# Altium PCB PCB v58 rev 1.50_2023-03-18.pcbdoc (part 2 of 2)
Units mil, origin at the board's own origin, x right, y up, seen from the top; angles counter-clockwise.
Board outline 7099.86 x 4632 mil, 2 copper layers (Top Layer, Bottom Layer); 87 components, 84 nets, 446 pads, 172 vias.
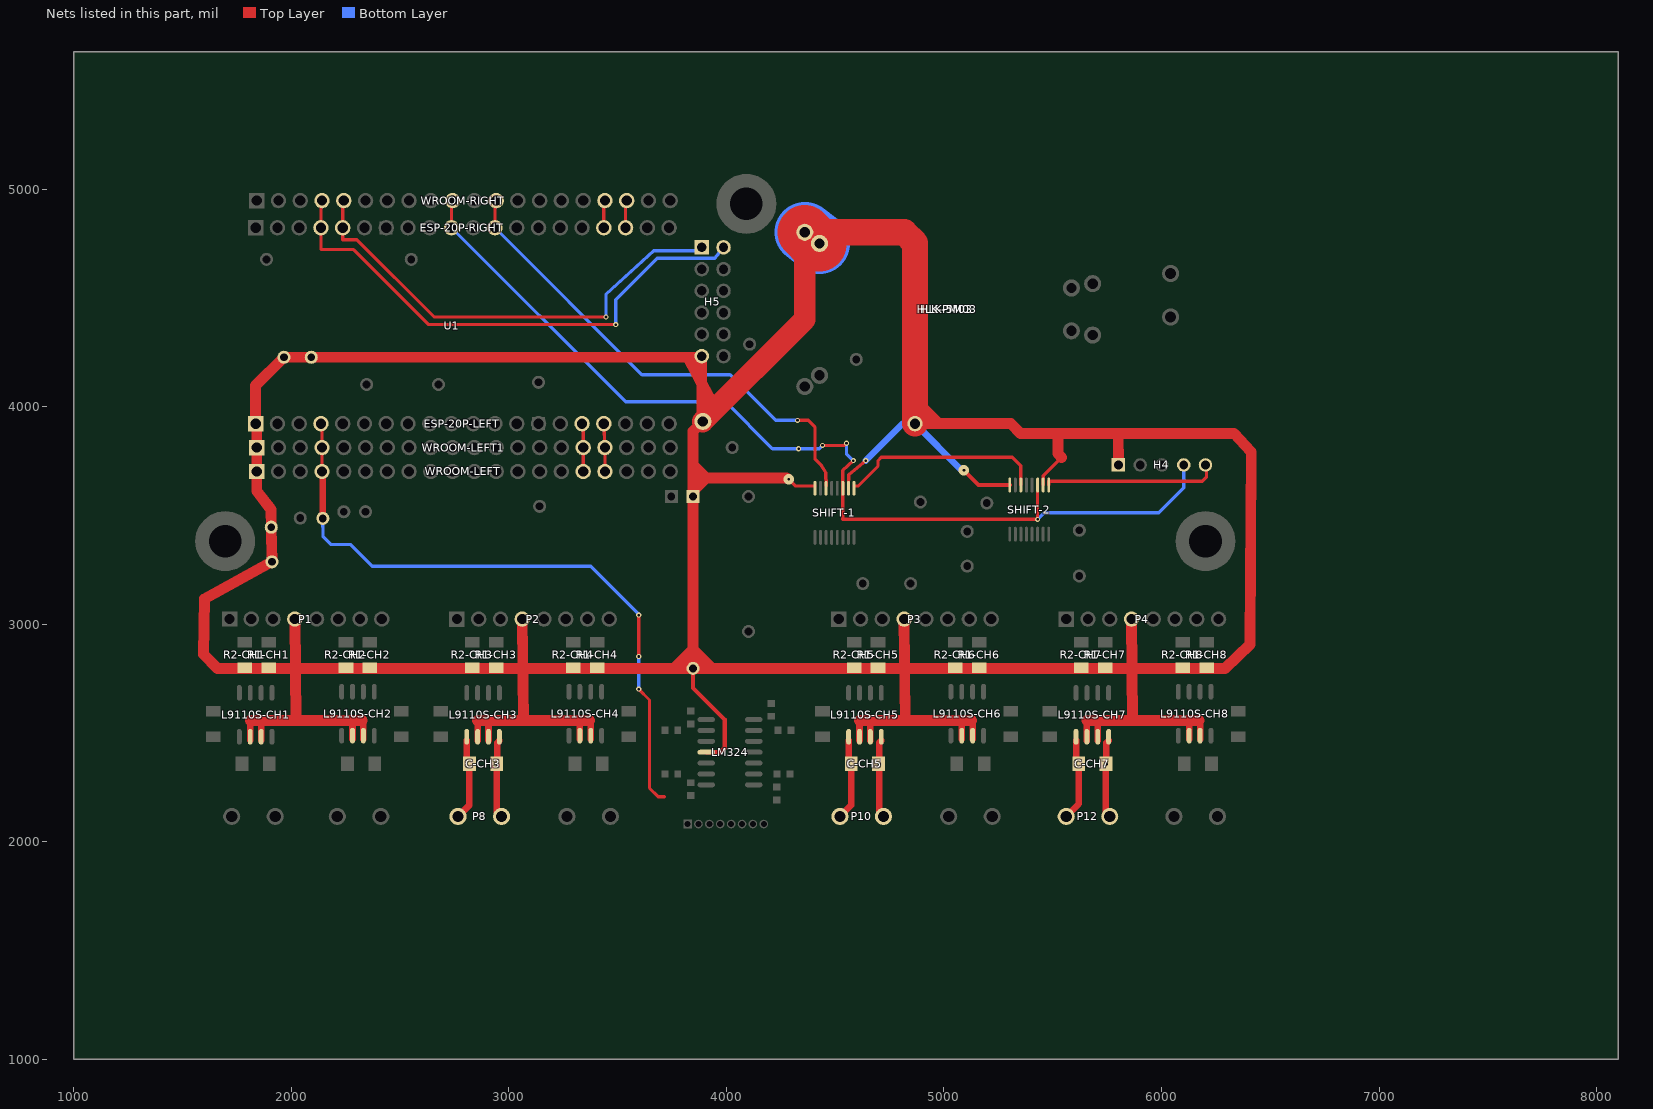
[diagram p2: the nets of this part, all layers, seen from the top]

## Via types
v1: diameter 24, hole 12, Top Layer to Bottom Layer, tented both sides, 152 vias
v2: diameter 48, hole 12, Top Layer to Bottom Layer, tented both sides, 19 vias
v3: diameter 48, hole 24, Top Layer to Bottom Layer, tented both sides, 1 vias

## Nets (pads, with @x,y where several pads share a name; then routed paths per layer and width w, separated by ;. In a path a pad name is that pad's centre, name@x,y a point inside that pad or via, vN(x,y) a via of type N, cw(c..) or ccw(c..) an arc to the next point about the centre after c; other vN are vias at no path point) (continued)
RJ11-CH3_1: C-CH3.2 L9110S-CH3.1 P8.2 | length 375.4
  Top Layer w30: P8.2@2767,2117 2819.3,2169.3 C-CH3.2@2819.3,2358.9 ; L9110S-CH3.1@2807,2465.8 2807,2370.9 C-CH3.2@2819,2358.9
RJ11-CH3_3: C-CH3.1 L9110S-CH3.4 P8.1 | length 364.1
  Top Layer w30: C-CH3.1@2944.7,2358.9 2944.7,2139.3 P8.1@2967,2117 ; v1(2947,2357) 2947,2455.8 L9110S-CH3.4@2957,2465.8
RJ11-CH5_1: C-CH5.2 L9110S-CH5.1 P10.2 | length 375.4
  Top Layer w30: P10.2@4522,2117 4574.3,2169.3 C-CH5.2@4574.3,2358.9 ; L9110S-CH5.1@4562,2465.8 4562,2370.9 C-CH5.2@4574,2358.9
RJ11-CH5_3: C-CH5.1 L9110S-CH5.4 P10.1 | length 361.2
  Top Layer w30: L9110S-CH5.4@4712,2465.8 4702,2455.8 v1(4702,2357) 4702,2137 P10.1@4722,2117
RJ11-CH7_1: C-CH7.2 L9110S-CH7.1 P12.2 | length 377.5
  Top Layer w30: P12.2@5562,2117 5619.3,2174.3 C-CH7.2@5619.3,2358.9 ; L9110S-CH7.1@5607,2465.8 5607,2370.9 C-CH7.2@5619,2358.9
RJ11-CH7_3: C-CH7.1 L9110S-CH7.4 P12.1 | length 362
  Top Layer w30: C-CH7.1@5744.7,2358.9 5744.7,2134.3 P12.1@5762,2117 ; v1(5747,2357) 5747,2455.8 L9110S-CH7.4@5757,2465.8
RX: ESP-20P-RIGHT.5 H5.1 U1.24 WROOM-RIGHT.5 | length 2167.7
  Top Layer w15: WROOM-RIGHT.5@2242,4947 2237,4942 2237,4827 2237,4767 2302,4767 2657,4412 v1(3447,4412)
  Bottom Layer w15: v1(3447,4412) 3447,4517 3667,4717 3872,4717 H5.1@3887,4732
S$711192: 
S$711201: 
SD0: ESP-20P-RIGHT.18 U1.37 WROOM-RIGHT.18 | length 127.1
  Top Layer w15: ESP-20P-RIGHT.18@3537,4822 3537,4942 WROOM-RIGHT.18@3542,4947
SD1: ESP-20P-RIGHT.17 U1.36 WROOM-RIGHT.17 | length 127.1
  Top Layer w15: ESP-20P-RIGHT.17@3437,4822 3437,4942 WROOM-RIGHT.17@3442,4947
SD2: ESP-20P-LEFT.16 U1.16 WROOM-LEFT1.16 WROOM-LEFT.16 | length 620
  Top Layer w15: ESP-20P-LEFT.16@3337,3922 3342,3917 WROOM-LEFT1.16@3342,3812 3342,3737.8 ; WROOM-LEFT1.16@3340.7,3796.9 WROOM-LEFT1.16@3342,3796.9 ; WROOM-LEFT1.16@3341.1,3802.2 WROOM-LEFT1.16@3342,3801.3 ; WROOM-LEFT1.16@3337,3827 WROOM-LEFT1.16@3342,3822 ; WROOM-LEFT1.16@3337,3827 WROOM-LEFT1.16@3342,3822 ; WROOM-LEFT1.16@3337,3827 WROOM-LEFT1.16@3342,3822 ; WROOM-LEFT1.16@3337,3827 WROOM-LEFT1.16@3342,3822 ; WROOM-LEFT.16@3342,3702 WROOM-LEFT.16@3342,3731.6 ; WROOM-LEFT.16@3342,3702 WROOM-LEFT.16@3342,3731.6 ; WROOM-LEFT.16@3342,3702 WROOM-LEFT.16@3342,3731.6 ; WROOM-LEFT.16@3342,3702 WROOM-LEFT.16@3342,3731.6 ; WROOM-LEFT.16@3342,3731.6 3342,3737.8 ; WROOM-LEFT.16@3342,3731.6 3342,3737.8 ; 3342,3737.8 WROOM-LEFT1.16@3342,3796.9 ; 3342,3737.8 WROOM-LEFT1.16@3342,3796.9 ; 3342,3737.8 WROOM-LEFT1.16@3342,3796.9 ; WROOM-LEFT1.16@3342,3796.9 WROOM-LEFT1.16@3342,3799.7 ; WROOM-LEFT1.16@3342,3796.9 WROOM-LEFT1.16@3342,3799.7 ; WROOM-LEFT1.16@3342,3799.7 WROOM-LEFT1.16@3342,3801.3 ; WROOM-LEFT1.16@3342,3799.7 WROOM-LEFT1.16@3342,3801.3 ; WROOM-LEFT1.16@3342,3799.7 WROOM-LEFT1.16@3342,3801.3 ; WROOM-LEFT1.16@3342,3799.7 WROOM-LEFT1.16@3342,3801.3 ; WROOM-LEFT1.16@3342,3801.3 WROOM-LEFT1.16@3342,3822 ; WROOM-LEFT1.16@3342,3801.3 WROOM-LEFT1.16@3342,3822 ; WROOM-LEFT1.16@3342,3801.3 WROOM-LEFT1.16@3342,3822 ; WROOM-LEFT1.16@3342,3801.3 WROOM-LEFT1.16@3342,3822
SD3: ESP-20P-LEFT.17 U1.17 WROOM-LEFT1.17 WROOM-LEFT.17 | length 618.1
  Top Layer w15: ESP-20P-LEFT.17@3437,3922 WROOM-LEFT1.17@3442,3812 3442,3737.8 ; WROOM-LEFT1.17@3440.7,3796.9 WROOM-LEFT1.17@3442,3796.9 ; WROOM-LEFT1.17@3441.1,3802.2 WROOM-LEFT1.17@3442,3801.3 ; WROOM-LEFT1.17@3437,3827 WROOM-LEFT1.17@3442,3822 ; WROOM-LEFT1.17@3437,3827 WROOM-LEFT1.17@3442,3822 ; WROOM-LEFT1.17@3437,3827 WROOM-LEFT1.17@3442,3822 ; WROOM-LEFT1.17@3437,3827 WROOM-LEFT1.17@3442,3822 ; WROOM-LEFT.17@3442,3702 WROOM-LEFT.17@3442,3731.6 ; WROOM-LEFT.17@3442,3702 WROOM-LEFT.17@3442,3731.6 ; WROOM-LEFT.17@3442,3702 WROOM-LEFT.17@3442,3731.6 ; WROOM-LEFT.17@3442,3702 WROOM-LEFT.17@3442,3731.6 ; WROOM-LEFT.17@3442,3731.6 3442,3737.8 ; WROOM-LEFT.17@3442,3731.6 3442,3737.8 ; 3442,3737.8 WROOM-LEFT1.17@3442,3796.9 ; 3442,3737.8 WROOM-LEFT1.17@3442,3796.9 ; 3442,3737.8 WROOM-LEFT1.17@3442,3796.9 ; WROOM-LEFT1.17@3442,3796.9 WROOM-LEFT1.17@3442,3799.7 ; WROOM-LEFT1.17@3442,3796.9 WROOM-LEFT1.17@3442,3799.7 ; WROOM-LEFT1.17@3442,3799.7 WROOM-LEFT1.17@3442,3801.3 ; WROOM-LEFT1.17@3442,3799.7 WROOM-LEFT1.17@3442,3801.3 ; WROOM-LEFT1.17@3442,3799.7 WROOM-LEFT1.17@3442,3801.3 ; WROOM-LEFT1.17@3442,3799.7 WROOM-LEFT1.17@3442,3801.3 ; WROOM-LEFT1.17@3442,3801.3 WROOM-LEFT1.17@3442,3822 ; WROOM-LEFT1.17@3442,3801.3 WROOM-LEFT1.17@3442,3822 ; WROOM-LEFT1.17@3442,3801.3 WROOM-LEFT1.17@3442,3822 ; WROOM-LEFT1.17@3442,3801.3 WROOM-LEFT1.17@3442,3822
SENSORVN: ESP-20P-LEFT.4 pad.26 U1.4 WROOM-LEFT1.4 WROOM-LEFT.4 | length 3025.3
  Top Layer w15: ESP-20P-LEFT.4@2137,3922 2142,3917 WROOM-LEFT1.4@2142,3812 WROOM-LEFT.4@2142,3702 ; v1(3597,2702) 3647,2652 3647,2247 3687,2207 3714.44,2207 ; v1(3597,2852) v1(3597,3042)
  Top Layer w30: WROOM-LEFT.4@2142,3702 2145.59,3698.41 pad.26@2145.59,3486.66
  Bottom Layer w15: pad.26@2145.59,3486.66 2147,3402 2182,3367 2272,3367 2372,3267 3377,3267 3597,3047 v1(3597,3042) ; v1(3597,2702) v1(3597,2852)
SER: ESP-20P-RIGHT.12 SHIFT-1.14 U1.31 WROOM-RIGHT.12 | length 2265.9
  Top Layer w15: ESP-20P-RIGHT.12@2937,4822 2937,4942 WROOM-RIGHT.12@2942,4947 ; v1(4327,3937) 4377,3937 4407,3907 4407,3759.86 4414.86,3752 ; 4414.9,3752 4434.9,3732 4457,3697 SHIFT-1.14@4458.6,3635.1
  Bottom Layer w15: ESP-20P-RIGHT.12@2937,4822 3612,4147 4017,4147 4227,3937 v1(4327,3937)
SHIFT-2_9: H4.5 SHIFT-2.9 | length 807.7
  Top Layer w15: SHIFT-2.9@5481.6,3640.1 5481.6,3657 6187,3657 6207,3677 6207,3727 H4.5@6202,3732
SHIFT-2_14: SHIFT-1.9 SHIFT-2.14 | length 940.5
  Top Layer w15: SHIFT-1.9@4586.6,3635.1 4605.1,3635.1 4697,3727 4697,3752 4712,3767 5314.9,3767 5353.6,3728.2 SHIFT-2.14@5353.6,3640.1
SRCLK: ESP-20P-RIGHT.10 H4.4 SHIFT-1.11 SHIFT-2.11 U1.29 WROOM-RIGHT.10 | length 4656.9
  Top Layer w15: ESP-20P-RIGHT.10@2737,4822 2737,4942 WROOM-RIGHT.10@2742,4947 ; v1(4442,3822) 4542,3822 v1(4552,3832) ; v1(4584.14,3752) 4535.4,3707 4535.4,3635.1 4535.4,3482 v1(5430.4,3482) SHIFT-2.11@5430.4,3644.8
  Bottom Layer w15: ESP-20P-RIGHT.10@2737,4827 ESP-20P-RIGHT.10@2737,4822 3537,4022 3997,4022 4212,3807 v1(4332,3807) 4427,3807 v1(4442,3822) ; v1(4552,3832) 4552,3784.14 v1(4584.14,3752) ; v1(5430.4,3482) 5460.4,3512 5987,3512 6102,3627 H4.4@6102,3732
TX: ESP-20P-RIGHT.4 H5.2 U1.23 WROOM-RIGHT.4 | length 2437.7
  Top Layer w15: WROOM-RIGHT.4@2142,4947 2137,4942 2137,4827 2137,4722 2287,4722 2632,4377 v1(3492,4377)
  Bottom Layer w15: v1(3492,4377) 3492,4492 3682,4682 3947,4682 H5.2@3987,4732
VCC: ESP-20P-LEFT.1 H4.1 H5.11 HLK-5M03.4 HLK-PM03.4 L9110S-CH1.2 L9110S-CH1.3 L9110S-CH2.2 L9110S-CH2.3 L9110S-CH3.2 L9110S-CH3.3 L9110S-CH4.2 L9110S-CH4.3 L9110S-CH5.2 L9110S-CH5.3 L9110S-CH6.2 L9110S-CH6.3 L9110S-CH7.2 L9110S-CH7.3 L9110S-CH8.2 L9110S-CH8.3 LM324.4 P1.4 P2.4 P3.4 P4.4 pad.1@3847,3587 pad.2 pad.19 pad.20 pad.21 pad.22 pad.23 pad.24 R1-CH1.2 R1-CH2.2 R1-CH3.2 R1-CH4.2 R1-CH5.2 R1-CH6.2 R1-CH7.2 R1-CH8.2 R2-CH1.2 R2-CH2.2 R2-CH3.2 R2-CH4.2 R2-CH5.2 R2-CH6.2 R2-CH7.2 R2-CH8.2 SHIFT-1.10 SHIFT-1.16 SHIFT-2.10 SHIFT-2.16 U1.1 WROOM-LEFT1.1 WROOM-LEFT.1 | length 27779.6
  Top Layer w15: v2(4287,3667) 4318.9,3635.1 SHIFT-1.16@4407.4,3635.1 ; 4482,4747 4482,4791.3 ; SHIFT-1.10@4561,3635.1 4562,3687 v1(4640.57,3752) ; SHIFT-2.16@5302.43,3639.83 5158.9,3640.1 ; SHIFT-2.16@5302.4,3640.1 5158.9,3640.1 ; 5532,3758.4 5540.6,3767 ; v2(5092,3707) 5158.9,3640.1 ; v2(5092,3707) 5158.9,3640.1 ; v2(5092,3707) 5158.9,3640.1 ; 5456,3682.4 5456,3640.1 5456,3682.4 ; 5456,3682.4 5540.6,3767 ; 5456,3682.4 5540.6,3767
  Top Layer w20: pad.19@3847,2797 3847,2707 3992,2562 3992,2432 3972,2412 LM324.4@3907.98,2412 ; 5158.9,3640.1 5302.4,3640.1 5158.9,3640.1 ; 5158.9,3640.1 v2(5092,3707) 5158.9,3640.1
  Top Layer w30: L9110S-CH1.2@1812,2465.9 1812,2547.1 ; L9110S-CH1.3@1862,2465.9 1862,2547 1862,2547.1 ; L9110S-CH2.2@2282,2470.9 2282,2542.4 2282,2547.1 ; L9110S-CH2.3@2332,2470.9 2332,2547.1 ; L9110S-CH3.2@2857,2465.8 2857,2547 ; L9110S-CH3.3@2907,2465.8 2907,2547 ; L9110S-CH4.2@3327,2470.8 3327,2547 ; L9110S-CH4.3@3377,2470.8 3377,2547 ; L9110S-CH5.2@4612,2465.8 4612,2547 ; L9110S-CH5.3@4662,2465.8 4662,2547 ; L9110S-CH6.2@5082,2470.8 5082,2547 ; L9110S-CH6.3@5132,2470.8 5132,2547 ; L9110S-CH7.2@5657,2465.8 5657,2547 ; L9110S-CH7.3@5707,2465.8 5707,2547 ; L9110S-CH8.2@6127,2470.8 6127,2547 ; L9110S-CH8.3@6177,2470.8 6177,2547
  Top Layer w50: R2-CH1.2@1787,2795.9 1897,2795.9 2016.6,2795.9 2017,2797 ; R2-CH1.2@1787,2796 1897,2796 2016.6,2796 2017,2797.1 ; 1812,2557.12 2022,2557.12 P1.4@2017,3024.01 ; pad.24@1908.69,3445.96 pad.23@1912,3287 1602,3117 1597,2862 1662,2797 pad.19@3847,2797 ; pad.24@1908.69,3445.96 1907,3527 1842,3612 WROOM-LEFT.1@1842,3702 WROOM-LEFT1.1@1842,3812 1842,3912 1837,3917 1837,4097 pad.21@1967,4227 pad.22@2092.42,4227 3882,4227 H5.11@3887,4232 pad.20@3887,3937 ; 2017,2557.12 2327,2557.12 ; 2022,2795.5 2022.4,2795.9 2252,2795.9 R1-CH2.2@2362,2795.9 ; 2022,2795.6 2022.4,2796 2252,2796 R1-CH2.2@2362,2796 ; R2-CH3.2@2832,2795.9 2942,2795.9 3061.6,2795.9 3062,2797 ; 2857,2557 3067,2557 P2.4@3062,3023.89 ; 3062,2557 3372,2557 ; 3067,2795.5 3067.4,2795.9 3297,2795.9 R1-CH4.2@3407,2795.9 ; 3759.23,2797 3841.55,2879.32 3847,2879.32 ; 3822,4227 3950,3988 pad.20@3887,3937 ; pad.19@3847,2812 3847,2795.9 R1-CH6.2@5162,2795.9 ; 3847,2884.7 3923.2,2808.4 3923.2,2795.9 ; 3847,3622.07 3856.47,3622.07 3906.4,3672 ; 3847,3731.3 3906.4,3672 ; pad.19@3869,2806 3856,2806 pad.19@3847,2797 ; v2@4277,3672 3906.4,3672 ; R2-CH5.2@4587,2795.9 4697,2795.9 4816.6,2795.9 4817,2797 ; 4612,2557 4822,2557 P3.4@4817,3023.89 ; 4817,2557 5127,2557 ; 4822,2795.5 4822.4,2795.9 5052,2795.9 R1-CH6.2@5162,2795.9 ; pad.2@4867,3922 5307,3922 5352,3877 6332,3877 6412,3792 6407,2907 6292,2795.9 5867.4,2795.9 ; 4867,4030.27 4963.46,3933.81 4963.46,3922 ; 5524,3877 5523.38,3784.19 5540.57,3767 ; R2-CH7.2@5632,2795.9 5742,2795.9 5861.6,2795.9 5862,2797 ; 5657,2557 5867,2557 P4.4@5862,3023.89 ; 5799.5,3877 5801,3877 H4.1@5802,3732 ; 5862,2557 6172,2557 ; 5867,2795.5 5867.4,2795.9 ; R1-CH8.2@6192,2795.9 R1-CH6.2@5162,2795.9 ; R1-CH8.2@6207,2795.9 6097,2795.9 5867.4,2795.9 ; pad.19@3847,2797 3847,3887 pad.20@3892,3931.99 pad.20@3887,3937
  Top Layer w100: pad.20@3892,3931.99 4360.59,4400.59 HLK-5M03.4@4360.59,4801.33
  Top Layer w120: HLK-5M03.4@4360.6,4801.3 4817.7,4801.3 4867,4752 pad.2@4867,3922
  Top Layer w250: HLK-5M03.4@4360.59,4801.33 4416.77,4745.15 HLK-PM03.4@4428.26,4745.15
  Bottom Layer w30: v1(4640.57,3752) 4810.6,3922 pad.2@4867,3922 5082,3707 v2(5092,3707)
  Bottom Layer w280: HLK-5M03.4@4360.56,4801.36 HLK-PM03.4@4428.26,4750.15
pads on no net: ESP-20P-LEFT.20 ESP-20P-RIGHT.20 WROOM-LEFT1.20 WROOM-LEFT.20 WROOM-RIGHT.20

## Polygon pours and split planes (outlines as drawn)
GND on Bottom Layer (solid): 1797,5082 1797,3872 1802,3867 5352,3867 5382,3897 5382,5072 5367,5087
GND on Bottom Layer (solid): 1504.5,3969.5 1504.5,1784.5 6444.5,1784.5 6449.5,1779.5 6449.5,3989.5 6434.5,4004.5
GND on Bottom Layer (solid): 1502,3952 1502,1772 1507,1767 6447,1767 6447,3962 6452,3967

## Other copper
Top Layer:
  drawing of 468 lines, arcs and shapes, not listed
  text "barbarossa" at 5662,3242 h60
Bottom Layer:
  region net CH5_6_OPAMP_IN: 4036.76,2095.02 4007.24,2095.02 4014.5,2108.8 4029.5,2108.8
  region net CH5_6_OPAMP_IN: 4126.77,2350.02 4114.04,2362.75 4109.16,2355.75 4119.77,2345.14
  region net CH1_2-BEMF: 3886.76,2068.98 3857.24,2068.98 3864.5,2055.2 3879.5,2055.2
  region net CH1_2-BEMF: 3663,2269.06 3681,2269.06 3679.5,2260.66 3664.5,2260.66
  region net CH1-BEMF: 3802.32,2063.25 3802.32,2100.75 3779.82,2089.5 3779.82,2074.5
  region net CH1-BEMF: 3918.98,2462.75 3906.25,2450.02 3913.25,2445.14 3923.86,2455.75
  region net CH7_8-BEMF: 4152.35,2080.77 4173.23,2101.65 4158.35,2106.25 4147.75,2095.65
  region net CH7_8-BEMF: 4048,2244.06 4066,2244.06 4064.5,2235.66 4049.5,2235.66
  region net RX: 3853.54,4698.54 3853.54,4735.75 3831.04,4724.5 3831.04,4709.5
  region net CH1-BEMF: 1698.25,3059.44 1735.75,3059.44 1724.5,3062 1709.5,3062
  region net CH3_4_OPAMP_IN: 2789.06,2988.46 2726.57,2988.46 2685.34,2943.46 2727.77,2943.46
  region net CH3_4_OPAMP_IN: 2743.25,3059.32 2780.75,3059.32 2769.5,3081.82 2754.5,3081.82
  region net CH7_8_OPAMP_IN: 5526.57,3025.58 5526.57,3059.32 5504.07,3077.44 5504.07,3056.23
  region net CH7_8_OPAMP_IN: 5589.06,2988.46 5526.57,2988.46 5485.34,2943.46 5527.77,2943.46
  region net CH5_6_OPAMP_IN: 4481.57,3004.69 4481.57,3042.19 4459.07,3030.64 4459.07,3015.64
  region net CH5_6_OPAMP_IN: 4544.06,2988.46 4481.57,2988.46 4440.34,2943.46 4482.77,2943.46
  region net CH7_8-BEMF: 3398.98,3412.75 3386.25,3400.02 3393.25,3395.14 3403.86,3405.75
  region net CH7_8-BEMF: 3968,2724.94 3986,2724.94 3984.5,2733.34 3969.5,2733.34
  region net CH5_6-BEMF: 3398.98,3367.75 3386.25,3355.02 3393.25,3350.14 3403.86,3360.75
  region net CH5_6-BEMF: 3908,2724.94 3926,2724.94 3924.5,2733.34 3909.5,2733.34
  region net CH7_8_OPAMP_IN: 4348,2734.94 4366,2734.94 4364.5,2743.34 4349.5,2743.34
  region net CH7_8_OPAMP_IN: 4343.98,2857.75 4331.25,2845.02 4338.25,2840.14 4348.86,2850.75
  region net CH1_2-BEMF: 2298.98,3407.75 2286.25,3395.02 2293.25,3390.14 2303.86,3400.75
  region net CH1_2-BEMF: 3723.42,2619.96 3705.42,2619.92 3706.9,2628.32 3721.9,2628.36
  region net SENSORVN: 3585.14,3043.86 3600.33,3053.53 3594.7,3059.91 3581.74,3051.65
  region net SENSORVN: 3588,2844.06 3606,2844.06 3604.5,2835.66 3589.5,2835.66
  region net SENSORVN: 3588,2709.94 3606,2709.94 3604.5,2718.34 3589.5,2718.34
  region net CH3_4_OPAMP_IN: 3899.06,2353 3899.06,2371 3890.66,2369.5 3890.66,2354.5
  region net CH1-BEMF: 3899.06,2453 3899.06,2471 3890.66,2469.5 3890.66,2454.5
  region net CH7_8_OPAMP_IN: 4049.94,3478 4049.94,3496 4058.34,3494.5 4058.34,3479.5
  region net RX: 3438,4419.94 3456,4419.94 3454.5,4428.34 3439.5,4428.34
  region net EXT-ADC2: 2807.75,4670.02 2795.02,4682.75 2790.14,4675.75 2800.75,4665.14
  region net EXT-ADC1: 2767.75,4720.02 2755.02,4732.75 2750.14,4725.75 2760.75,4715.14
  region net EXT-IO19: 3689.94,4488 3689.94,4506 3698.34,4504.5 3698.34,4489.5
  region net TX: 3483,4384.94 3501,4384.94 3499.5,4393.34 3484.5,4393.34
  region net EXT-IO22: 3694.94,4333 3694.94,4351 3703.34,4349.5 3703.34,4334.5
  region net SRCLK: 5442.37,3481.25 5429.65,3493.98 5436.65,3498.86 5447.25,3488.25
  region net RCLK: 5409.94,3758 5409.94,3776 5418.34,3774.5 5418.34,3759.5
  region net CH5_6_OPAMP_IN: 4764.06,3348 4764.06,3366 4757,3364.5 4757,3349.5
  region net CH5_6_OPAMP_IN: 4853.05,3291.68 4845.26,3275.45 4853.48,3273.17 4859.97,3286.69
  region net CH7_8_OPAMP_IN: 4794.06,3428 4794.06,3446 4785.66,3444.5 4785.66,3429.5
  region net CH7_8_OPAMP_IN: 4954.94,3343 4954.94,3361 4963.34,3359.5 4963.34,3344.5
  region net CH7_8_OPAMP_IN: 4954.94,3343 4954.94,3361 4963.34,3359.5 4963.34,3344.5
  region net SRCLK: 4543,3824.06 4561,3824.06 4559.5,3815.66 4544.5,3815.66
  region net SRCLK: 4442.75,3810.02 4430.02,3822.75 4425.14,3815.75 4435.75,3805.14
  region net SRCLK: 4339.94,3798 4339.94,3816 4348.34,3814.5 4348.34,3799.5
  region net SRCLK: 4324.06,3798 4324.06,3816 4315.66,3814.5 4315.66,3799.5
  region net RCLK: 4324.06,3868 4324.06,3886 4315.66,3884.5 4315.66,3869.5
  region net RCLK: 4339.94,3868 4339.94,3886 4348.34,3884.5 4348.34,3869.5
  region net SER: 4319.06,3928 4319.06,3946 4310.66,3944.5 4310.66,3929.5
  region net CH6-IA: 5103,3119.06 5121,3119.06 5119.5,3110.66 5104.5,3110.66
  region net CH5_6_OPAMP_IN: 4014.94,3438 4014.94,3456 4023.34,3454.5 4023.34,3439.5
  region net CH3-IA: 4358.99,3146.52 4345.98,3158.96 4352.87,3163.99 4363.71,3153.63
  region net CH4-IB: 4389.94,3108 4389.94,3126 4398.34,3124.5 4398.34,3109.5
  region net CH3-IB: 4179.06,3168 4179.06,3186 4170.66,3184.5 4170.66,3169.5
  region net CH3-IA: 4179.06,3138 4179.06,3156 4170.66,3154.5 4170.66,3139.5
  region net CH4-IB: 4182.2,3106 4176.69,3123.14 4169.04,3119.5 4173.86,3104.5
  region net CH4-IB: 4474.06,3108 4474.06,3126 4465.66,3124.5 4465.66,3109.5
  region net CH4-IA: 4182.2,3071 4176.69,3088.14 4169.04,3084.5 4173.86,3069.5
  region net CH4-IA: 3779.94,3068 3779.94,3086 3788.34,3084.5 3788.34,3069.5
  region net CH4-IB: 3779.94,3103 3779.94,3121 3788.34,3119.5 3788.34,3104.5
  region net CH3-IA: 3779.94,3138 3779.94,3156 3788.34,3154.5 3788.34,3139.5
  region net CH3-IB: 3779.94,3168 3779.94,3186 3788.34,3184.5 3788.34,3169.5
  region net CH2-IB: 4283.99,3421.64 4270.14,3410.14 4276.64,3404.62 4288.23,3414.24
  region net CH2-IB: 4167.2,3316 4161.69,3333.14 4154.04,3329.5 4158.86,3314.5
  region net CH2-IB: 3774.94,3313 3774.94,3331 3783.34,3329.5 3783.34,3314.5
  region net CH2-IB: 2248,3314.06 2266,3314.06 2264.5,3305.66 2249.5,3305.66
  region net CH2-IB: 2248,3219.94 2266,3219.94 2264.5,3228.34 2249.5,3228.34
  region net CH1-IA: 4174.06,3278 4174.06,3296 4165.66,3294.5 4165.66,3279.5
  region net CH1-IA: 3774.94,3278 3774.94,3296 3783.34,3294.5 3783.34,3279.5
  region net CH1-IA: 2203,3284.06 2221,3284.06 2219.5,3275.66 2204.5,3275.66
  region net CH1-IA: 2200.86,3217.31 2218,3211.8 2219.5,3220.14 2204.5,3224.96
  region net CH2-IB: 4415.61,3288.98 4402.88,3276.25 4398.01,3283.25 4408.61,3293.86
  region net CH3-IA: 4472.31,3265.04 4459.3,3277.48 4454.58,3270.37 4465.42,3260.01
  region net RCLK: 4528.46,3763.98 4515.73,3751.25 4510.85,3758.25 4521.46,3768.86
  region net SRCLK: 4584.89,3763.98 4572.16,3751.25 4567.28,3758.25 4577.89,3768.86
  region net CH7-IA: 5388.27,3252.76 5375.55,3240.02 5382.55,3235.15 5393.15,3245.76
  region net CH8-IB: 5554.94,3308 5554.94,3326 5563.34,3324.5 5563.34,3309.5
  region net VCC: 5088.28,3730.71 5068.94,3700.35 5056.19,3711.6 5072.7,3737.51
  region net CH5-IA: 5207.68,3685.02 5195.03,3697.82 5190.11,3690.85 5200.65,3680.18
  region net CH1-IB: 3779.94,3238 3779.94,3256 3788.34,3254.5 3788.34,3239.5
  region net CH1-IB: 4179.06,3238 4179.06,3256 4170.66,3254.5 4170.66,3239.5
  region net CH2-IA: 3779.94,3203 3779.94,3221 3788.34,3219.5 3788.34,3204.5
  region net CH2-IA: 4179.06,3203 4179.06,3221 4170.66,3219.5 4170.66,3204.5
  region net VCC: 4843.56,3895.43 4843.56,3948.57 4818.76,3937 4818.76,3907
  region net VCC: 4864.78,3886.64 4902.36,3924.22 4911.72,3898.5 4890.5,3877.28
  region net EXT-ADC2: 2566,3838.06 2513.14,3832.56 2529.5,3859.2 2544.5,3860.76
  region net EXT-ADC1: 2466,3838.06 2413.14,3832.56 2429.5,3859.2 2444.5,3860.76
  region net EXT-ADC2: 2559.5,3902.16 2514.5,3902.16 2529.5,3881.16 2544.5,3881.16
  region net EXT-ADC2: 2559.5,3941.84 2514.5,3941.84 2529.5,3962.84 2544.5,3962.84
  region net EXT-ADC2: 2559.5,3941.84 2514.5,3941.84 2529.5,3962.84 2544.5,3962.84
  region net EXT-ADC1: 2459.5,3941.84 2414.5,3941.84 2429.5,3962.84 2444.5,3962.84
  region net EXT-ADC1: 2459.5,3902.16 2414.5,3902.16 2429.5,3881.16 2444.5,3881.16
  region net EXT-ADC1: 2459.5,3941.84 2414.5,3941.84 2429.5,3962.84 2444.5,3962.84
  region net SER: 2935.12,4792.06 2966.94,4823.88 2971.18,4798.42 2960.58,4787.82
  region net RCLK: 2835.12,4792.06 2866.94,4823.88 2871.18,4798.42 2860.58,4787.82
  region net SRCLK: 2735.12,4792.06 2766.94,4823.88 2771.18,4798.42 2760.58,4787.82
  region net EXT-IO22: 3953.6,4434.1 3989.1,4398.6 3960.09,4394.48 3949.48,4405.09
  region net EXT-IO19: 3953.6,4534.1 3989.1,4498.6 3960.09,4494.48 3949.48,4505.09
  region net TX: 3992.77,4699.04 3953.57,4730.39 3952.68,4701.11 3964.4,4691.74
  region net RCLK: 5971.06,3733.94 6003.94,3701.06 5977.46,3696.85 5966.85,3707.46
  region net SRCLK: 6125.25,3711.5 6078.75,3711.5 6094.5,3689.8 6109.5,3689.8
  region net CH1-BEMF: 2381.64,3021.79 2419.22,3059.37 2388.19,3063.42 2377.59,3052.82
  region net CH3_4_OPAMP_IN: 3459.78,2988.53 3497.36,3026.11 3506.72,3000.39 3485.5,2979.17
  region net CH3_4_OPAMP_IN: 3426.64,3021.67 3464.22,3059.25 3433.19,3063.3 3422.59,3052.7
  region net CH3_4_OPAMP_IN: 3485.44,2997.32 3485.43,3050.47 3510.24,3031.4 3510.24,3016.4
  region net CH7_8_OPAMP_IN: 6256.4,3058.88 6227.99,3013.96 6217.12,3043.19 6225.35,3056.18
  region net CH7_8_OPAMP_IN: 6259.78,2988.53 6297.36,3026.11 6306.72,3000.39 6285.5,2979.17
  region net CH8-IB: 6056.4,3058.88 6027.99,3013.96 6017.12,3043.19 6025.35,3056.18
  region net CH7-IA: 5779.97,3054.43 5729.46,3037.9 5739.5,3067.28 5754.5,3072.19
  region net CH5_6_OPAMP_IN: 5243.57,3047.33 5190.43,3047.33 5209.5,3072.13 5224.5,3072.13
  region net CH5_6_OPAMP_IN: 5214.78,2988.53 5252.36,3026.11 5261.72,3000.39 5240.5,2979.17
  region net CH6-IA: 5141,3049.95 5088.14,3044.45 5104.5,3071.09 5119.5,3072.65
  region net CH5-IA: 4691.64,3048.64 4744.72,3045.96 4726.92,3071.69 4711.94,3072.45
  region net SER: 2934.78,4786.64 2972.36,4824.22 2976.41,4793.19 2965.81,4782.59
  region net RCLK: 2834.78,4786.64 2872.36,4824.22 2876.41,4793.19 2865.81,4782.59
  region net SRCLK: 2734.78,4786.64 2772.36,4824.22 2776.41,4793.19 2765.81,4782.59
  region net EXT-ADC2: 2563.57,3898.56 2510.43,3898.56 2529.5,3873.76 2544.5,3873.76
  region net EXT-ADC2: 2563.57,3945.44 2510.43,3945.44 2529.5,3970.24 2544.5,3970.24
  region net EXT-ADC2: 2563.57,3945.44 2510.43,3945.44 2529.5,3970.24 2544.5,3970.24
  region net EXT-ADC1: 2463.57,3945.44 2410.43,3945.44 2429.5,3970.24 2444.5,3970.24
  region net EXT-ADC1: 2463.57,3898.56 2410.43,3898.56 2429.5,3873.76 2444.5,3873.76
  region net EXT-ADC1: 2463.57,3945.44 2410.43,3945.44 2429.5,3970.24 2444.5,3970.24
  region net CH7_8_OPAMP_IN: 4173,2164.94 4191,2164.94 4189.5,2173.34 4174.5,2173.34
  region net CH5_6_OPAMP_IN: 4133.96,2353 4133.96,2371 4142.36,2369.5 4142.36,2354.5
  region net CH5_6_OPAMP_IN: 4283.98,2856.23 4269.74,2845.21 4274.5,2838.28 4289.5,2849.89
  region net CH7_8_OPAMP_IN: 4263,2404.94 4281,2404.94 4279.5,2413.34 4264.5,2413.34
  region net CH7_8_OPAMP_IN: 4136.31,2468.14 4130.8,2451 4139.14,2449.5 4143.96,2464.5

## Silkscreen, mask and mechanical layers (free items; w line width, h text height)
Top Overlay:
  lines w10: 3697,3537 3897,3537 3897,3637 3697,3637 3697,3537
  lines w30 net S$711192: 6422,5052 6427,5057 ; 6427,5057 5477,5057 5477,4022 6427,4022 6427,5057
  text "4" at 3048.89,5031.18 h32 r235
  text "2" at 3236,5027 h32 r270
  text "X" at 3742,5027 h20 r180
  text "0" at 3146,5022 h32 r270
  text "23" at 1973,5012 h32 r90
  text "22" at 2068,5012 h32 r90
  text "TX" at 2168,5012 h32 r90
  text "RX" at 2268,5012 h32 r90
  text "21" at 2368,5012 h32 r90
  text "19" at 2563,5012 h32 r90
  text "18" at 2663,5012 h32 r90
  text "15" at 3363,5012 h32 r90
  text "development board, no warranty" at 4472,5012 h30
  text "GND" at 2397,5006 h32
  text "sd1" at 3416.14,4996.55 h32 r15
  text "sd0" at 3506.14,4996.55 h32 r15
  text "SER" at 2924.78,4996.24 h32 r10
  text "CLK" at 3582,4994.5 h45
  text "SRCLK" at 2676.14,4991.55 h32 r15
  text "RCLK" at 2806.14,4991.55 h32 r15
  text "GND" at 1807,4989.5 h45
  text "PCB v58 rev 1.50 - screw terminal corrected" at 4417,4947 h30
  text "DANGER" at 5917,4882 h80
  text "Isolate that part" at 5857,4834.5 h45
  text "RX" at 3757,4696 h32
  text "TX" at 4047,4696 h32
  text "VCC 3.3V" at 4282,4619.5 h45
  text "230-L" at 5507,4619.5 h45
  text "L" at 6299.5,4597 h45 r270
  text "ADC1" at 3808,4577 h32 r90
  text "or 5V" at 4387,4564.5 h45
  text "ADC2" at 4103,4562 h32 r90
  text "18" at 3752,4496 h32
  text "19" at 4052,4486 h32
  text "free Pin" at 4179.5,4422 h45 r90
  text "21" at 3752,4396 h32
  text "22" at 4047,4396 h32
  text "HLK-5M0X / or HLK-PM0X" at 4477,4392 h80
  text "add. sensors" at 4244.5,4362 h45 r90
  text "N" at 6299.5,4362 h45 r270
  text "X" at 3992,4338 h32 r180
  text "ESP devkit" at 2392,4302 h80
  text "GND" at 4067,4301 h32
  text "100-240VAC" at 6399.5,4292 h45 r90
  text "23" at 3752,4291 h32
  text "(1000 or 900 mil width)" at 2347,4252 h40
  text "VCC" at 3813,4182 h32 r90
  text "/\ antenna /\" at 1892,4152 h40 r90
  text "Isolate that part" at 5847,4149.5 h45
  text "3.3V" at 1982,4147 h30
  text "GND" at 4272,4119.5 h45
  text "cutout" at 1962,4112 h30
  text "230-N" at 5502,4104.5 h45
  text "DANGER" at 5937,4022 h80
  text "VCC" at 3937,3894.5 h45
  text "GND" at 5862,3826 h32
  text "VCC" at 5762,3786 h32
  text "RCLK" at 5956.14,3781.55 h32 r15
  text "SRCLK" at 6076.14,3776.55 h32 r15
  text "QH'" at 6212.21,3771.87 h32 r19
  text "GND" at 4057,3724.5 h45
  text "en" at 1973,3587 h32 r90
  text "32" at 2468,3587 h32 r90
  text "33" at 2568,3587 h32 r90
  text "25" at 2668,3587 h32 r90
  text "26" at 2768,3587 h32 r90
  text "27" at 2868,3587 h32 r90
  text "14" at 2968,3587 h32 r90
  text "12" at 3068,3587 h32 r90
  text "13" at 3263,3587 h32 r90
  text "Shift Reg Out" at 5782,3579.5 h45
  text "GND" at 3102,3576 h32
  text "sd2" at 3368,3562 h32 r90
  text "VCC" at 1802,3559.5 h45
  text "sd3" at 3473,3557 h32 r90
  text "CH5|6" at 2269.47,3552.87 h25 r94
  text "CH7|8" at 2369.47,3552.87 h25 r94
  text "5V" at 3607,3549.5 h45
  text "cmd" at 3573,3542 h32 r90
  text "CH1|2" at 2072.94,3528.39 h32 r95
  text "CH3|4" at 2177.88,3515.05 h32 r83
  text "5V jumper" at 3692,3472 h30
  text "ESP devkit" at 2572,3467 h50
  text "SN74HC595" at 4762,3464.5 h45
  text "|---BEMF---|" at 2037,3406 h32
  text "3.3V" at 1957,3347 h30
  text "cutout" at 1942,3312 h30
  text "+" at 3036.09,2944.8 h45 r225
  text "+" at 4791.09,2944.8 h45 r225
  text "+" at 5836.09,2944.8 h45 r225
  text "-" at 2124.5,2927.12 h45 r90
  text "-" at 3169.5,2927 h45 r90
  text "-" at 4924.5,2927 h45 r90
  text "-" at 5969.5,2927 h45 r90
  text "+" at 1991.09,2913.1 h45 r315
  text "GND" at 4052,2859.5 h45
  text "VCC" at 3902,2764.5 h45
  text "CH2" at 2452,2309.62 h45
  text "CH4" at 3497,2309.5 h45
  text "CH6" at 5252,2309.5 h45
  text "CH8" at 6297,2309.5 h45
  text "CH1" at 1582,2304.62 h45
  text "CH3" at 2627,2304.5 h45
  text "CH5" at 4382,2304.5 h45
  text "CH7" at 5427,2304.5 h45
  text "A12in" at 3797,2032 h20 r270
  text "A12out" at 3847,2032 h20 r270
  text "A34in" at 3897,2032 h20 r270
  text "A34out" at 3947,2032 h20 r270
  text "A56in" at 4002,2032 h20 r270
  text "A56out" at 4047,2032 h20 r270
  text "A78in" at 4097,2032 h20 r270
  text "A78Out" at 4152,2032 h20 r270
Bottom Overlay:
  lines w15 net S$711201: 1522,4462 1527,4462 1522,3567 3687,3567 3687,5072 1527,5077 1527,4457 ; 4237,4887 4237,3992 5422,3992 5422,4882 4242,4882
  lines w50 net S$711192: 5477,5057 5477,4022 6427,4017 6427,5057 5482,5057
  text "DANGER" at 5937,5052 h80 r180
  text "CLK" at 3692,4999.5 h45
  text "GND" at 1917,4994.5 h45
  text "Isolate that part" at 6382,4834.5 h45
  text "VCC" at 4607,4744.5 h45
  text "100-240VAC" at 6404.5,4707 h45 r90
  text "L" at 6169.5,4597 h45 r90
  text "N" at 6184.5,4422 h45 r90
  text "230-L" at 5737,4419.5 h45
  text "HLK-5M0X / or HLK-PM0X" at 5252,4392 h80
  text "ESP devkit" at 3412,4257 h80
  text "230-N" at 5747,4199.5 h45
  text "Isolate that part" at 6377,4154.5 h45
  text "GND" at 4652,4059.5 h45
  text "DANGER" at 6367,4027 h80
  text "Shift Reg Out" at 6222,3789.5 h45
  text "GND" at 5942,3636 h32
  text "RCLK" at 6031.14,3631.55 h32 r15
  text "QH'" at 6245.05,3631.29 h32 r11
  text "SRCLK" at 6151.14,3626.55 h32 r15
  text "VCC" at 5832,3621 h32
  text "5V" at 3677,3564.5 h45
  text "VCC" at 1927,3559.5 h45
  text "IB" at 1792,2954.62 h45 r180
  text "IB" at 2837,2954.5 h45 r180
  text "IB" at 4592,2954.5 h45 r180
  text "IB" at 5637,2954.5 h45 r180
  text "IB" at 2192,2949.62 h45 r180
  text "IB" at 3237,2949.5 h45 r180
  text "IB" at 4992,2949.5 h45 r180
  text "IB" at 6037,2949.5 h45 r180
  text "IA" at 1869.5,2927.12 h45 r270
  text "IA" at 2274.5,2927.12 h45 r270
  text "IA" at 2914.5,2927 h45 r270
  text "IA" at 3319.5,2927 h45 r270
  text "IA" at 4669.5,2927 h45 r270
  text "IA" at 5074.5,2927 h45 r270
  text "IA" at 5714.5,2927 h45 r270
  text "IA" at 6119.5,2927 h45 r270
  text "GND" at 4172,2859.5 h45
  text "GND" at 2069.5,2847.12 h45 r270
  text "GND" at 3114.5,2847 h45 r270
  text "GND" at 4869.5,2847 h45 r270
  text "GND" at 5914.5,2847 h45 r270
  text "3.3V" at 1964.5,2832.12 h45 r270
  text "3.3V" at 3009.5,2832 h45 r270
  text "3.3V" at 4764.5,2832 h45 r270
  text "3.3V" at 5809.5,2832 h45 r270
  text "BEMF" at 1664.5,2822.12 h45 r270
  text "BEMF" at 2374.5,2822.12 h45 r270
  text "BEMF" at 2709.5,2822 h45 r270
  text "BEMF" at 3419.5,2822 h45 r270
  text "BEMF" at 4464.5,2822 h45 r270
  text "BEMF" at 5174.5,2822 h45 r270
  text "BEMF" at 5509.5,2822 h45 r270
  text "BEMF" at 6219.5,2822 h45 r270
  text "VCC" at 4017,2754.5 h45
  text "|PWR|" at 2142,2739.62 h45
  text "|PWR|" at 3187,2739.5 h45
  text "|PWR|" at 4942,2739.5 h45
  text "|PWR|" at 5987,2739.5 h45
  text "|-CH1-|" at 1942,2704.62 h45
  text "|-CH2-|" at 2432,2704.62 h45
  text "|-CH3-|" at 2987,2704.5 h45
  text "|-CH4-|" at 3477,2704.5 h45
  text "|-CH5-|" at 4742,2704.5 h45
  text "|-CH6-|" at 5232,2704.5 h45
  text "|-CH7-|" at 5787,2704.5 h45
  text "|-CH8-|" at 6277,2704.5 h45
  text "MOT 2" at 2232,2287.12 h40 r90
  text "MOT 4" at 3277,2287 h40 r90
  text "MOT 6" at 5032,2287 h40 r90
  text "MOT 8" at 6077,2287 h40 r90
  text "MOT 1" at 1712,2277.12 h40 r90
  text "MOT 3" at 2757,2277 h40 r90
  text "MOT 5" at 4512,2277 h40 r90
  text "MOT 7" at 5557,2277 h40 r90
  text "A12in" at 3797,1962.17 h20 r269
  text "A78in" at 4102,1957.17 h20 r269
  text "A56in" at 4002,1952.17 h20 r269
  text "A34in" at 3892,1947.17 h20 r269
  text "A12out" at 3847,1942 h20 r270
  text "A34out" at 3952,1932 h20 r270
  text "A56out" at 4047,1932 h20 r270
  text "A78Out" at 4152,1932 h20 r270
Top Solder:
  lines w34: 2042,3488.01 2042,3702 ; 2142,3702 2145.59,3698.41 2145.59,3486.66 ; 2242,3517 2242,3702 ; 2342,3517.34 2342,3702
  lines w54: 1908.69,3445.96 1912,3287 ; 1967,4227 2092.42,4227 ; 1912,3287 1912,3287

## Text inside footprints (layer, text, board x,y; h text height)
U1: Top Overlay "5V" at 3622,4022 h30 r270; Top Overlay "USB" at 3736.51,4379.5 h39.37 r270; Top Overlay "micro B" at 3652.41,4428.6 h39.37 r270; Top Overlay "ESP-WROOM-32" at 3237,4104.28 h35.43; Top Overlay "CMD" at 3505.6,4072 h30 r270; Top Overlay "SD3" at 3405.6,4072 h30 r270; Top Overlay "SD2" at 3305.6,4072 h30 r270; Top Overlay "IO13" at 3222,4072 h30 r270; Top Overlay "GND" at 3118.5,4042.1 h30 r270; Top Overlay "IO12" at 3005.6,4072 h30 r270; Top Overlay "IO14" at 2905.6,4072 h30 r270; Top Overlay "IO27" at 2805.6,4072 h30 r270; Top Overlay "IO26" at 2718.5,4042.1 h30 r270; Top Overlay "IO25" at 2618.1,4041.8 h30 r270; Top Overlay "IO33" at 2519.7,4041.8 h30 r270; Top Overlay "IO32" at 2418.5,4042.1 h30 r270; Top Overlay "IO35" at 2318.5,4042.1 h30 r270; Top Overlay "IO34" at 2219.1,4047.3 h30 r270; Top Overlay "SVN" at 2122,4072 h30 r270; Top Overlay "SVP" at 2005.6,4072 h30 r270; Top Overlay "EN" at 1905.6,4072 h30 r270; Top Overlay "3.3V" at 1820.6,4051.6 h30 r270; Top Overlay "IO19" at 2521.8,4761.6 h30 r270; Top Overlay "CLK" at 3622,4761.6 h30 r270; Top Overlay "SD0" at 3521.9,4761.6 h30 r270; Top Overlay "SD1" at 3421.8,4761.6 h30 r270; Top Overlay "IO15" at 3321.8,4761.6 h30 r270; Top Overlay "IO2" at 3221.8,4761.6 h30 r270; Top Overlay "IO0" at 3121.8,4761.6 h30 r270; Top Overlay "IO4" at 3021.8,4761.6 h30 r270; Top Overlay "IO16" at 2921.8,4761.6 h30 r270; Top Overlay "IO17" at 2821.8,4761.6 h30 r270; Top Overlay "IO5" at 2721.8,4761.6 h30 r270; Top Overlay "IO18" at 2621.8,4761.6 h30 r270; Top Overlay "GND" at 2421.8,4761.6 h30 r270; Top Overlay "IO21" at 2321.8,4761.6 h30 r270; Top Overlay "RXD0" at 2218.7,4758.8 h30 r270; Top Overlay "TXD0" at 2121.8,4761.6 h30 r270; Top Overlay "IO22" at 2021.8,4761.6 h30 r270; Top Overlay "IO23" at 1921.8,4761.6 h30 r270; Top Overlay "GND" at 1821.8,4761.6 h30 r270